# Altium PCB 106756.PcbDoc
Units mm, origin at the board's own origin, x right, y up, seen from the top; angles counter-clockwise.
Board outline 178.31 x 84.33 mm, 2 copper layers (Top Layer, Bottom Layer); 43 components, 33 nets, 148 pads, 59 vias.
Unrouted connection lines stored in the file: 1.
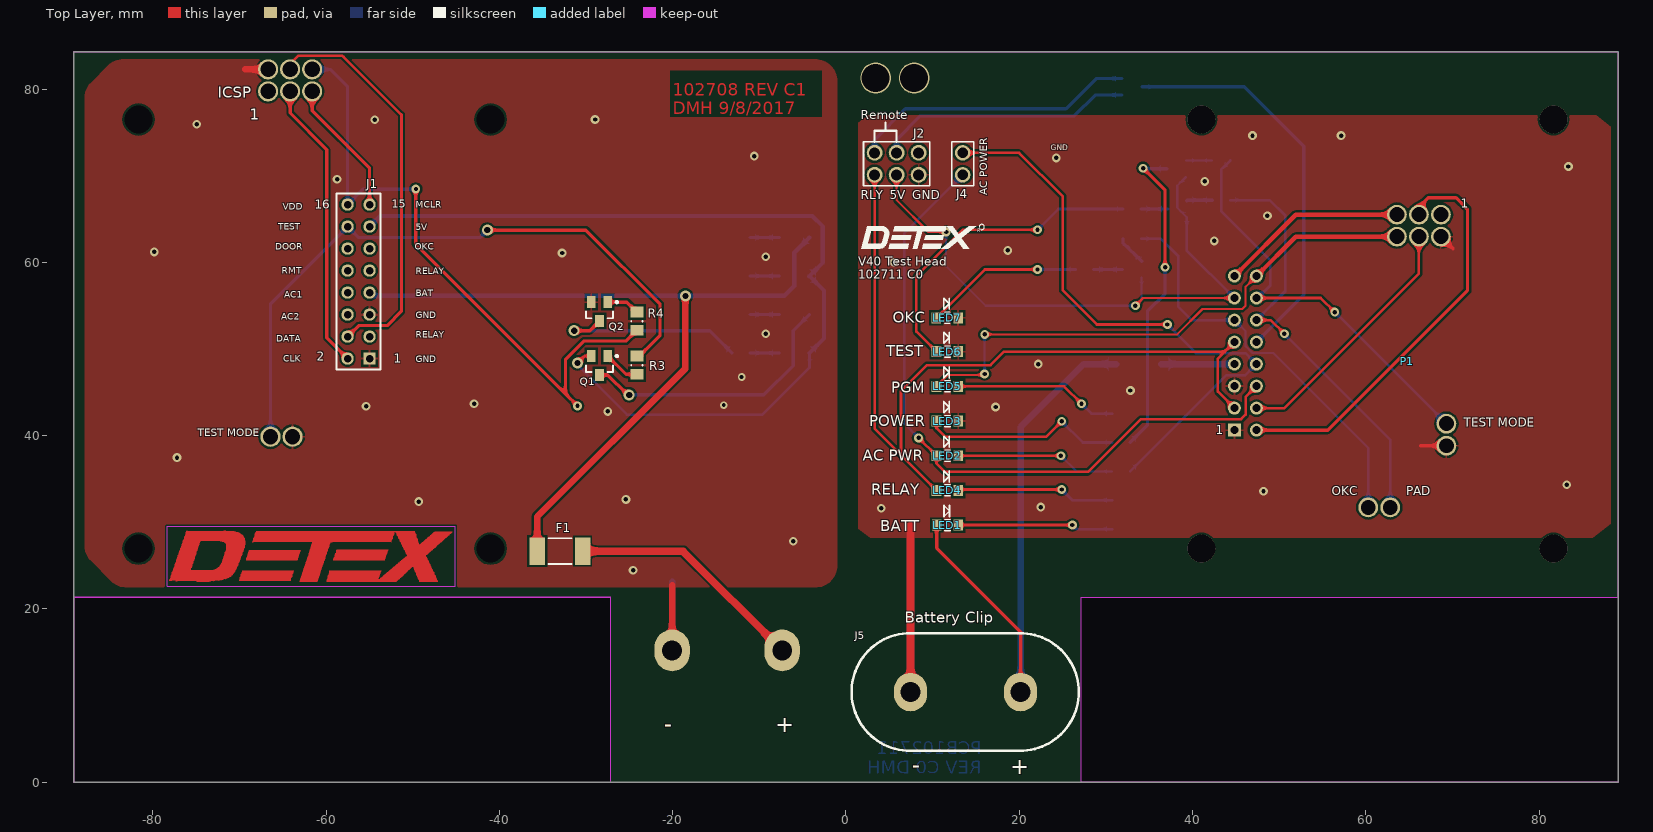
[diagram p0: Top Layer view]
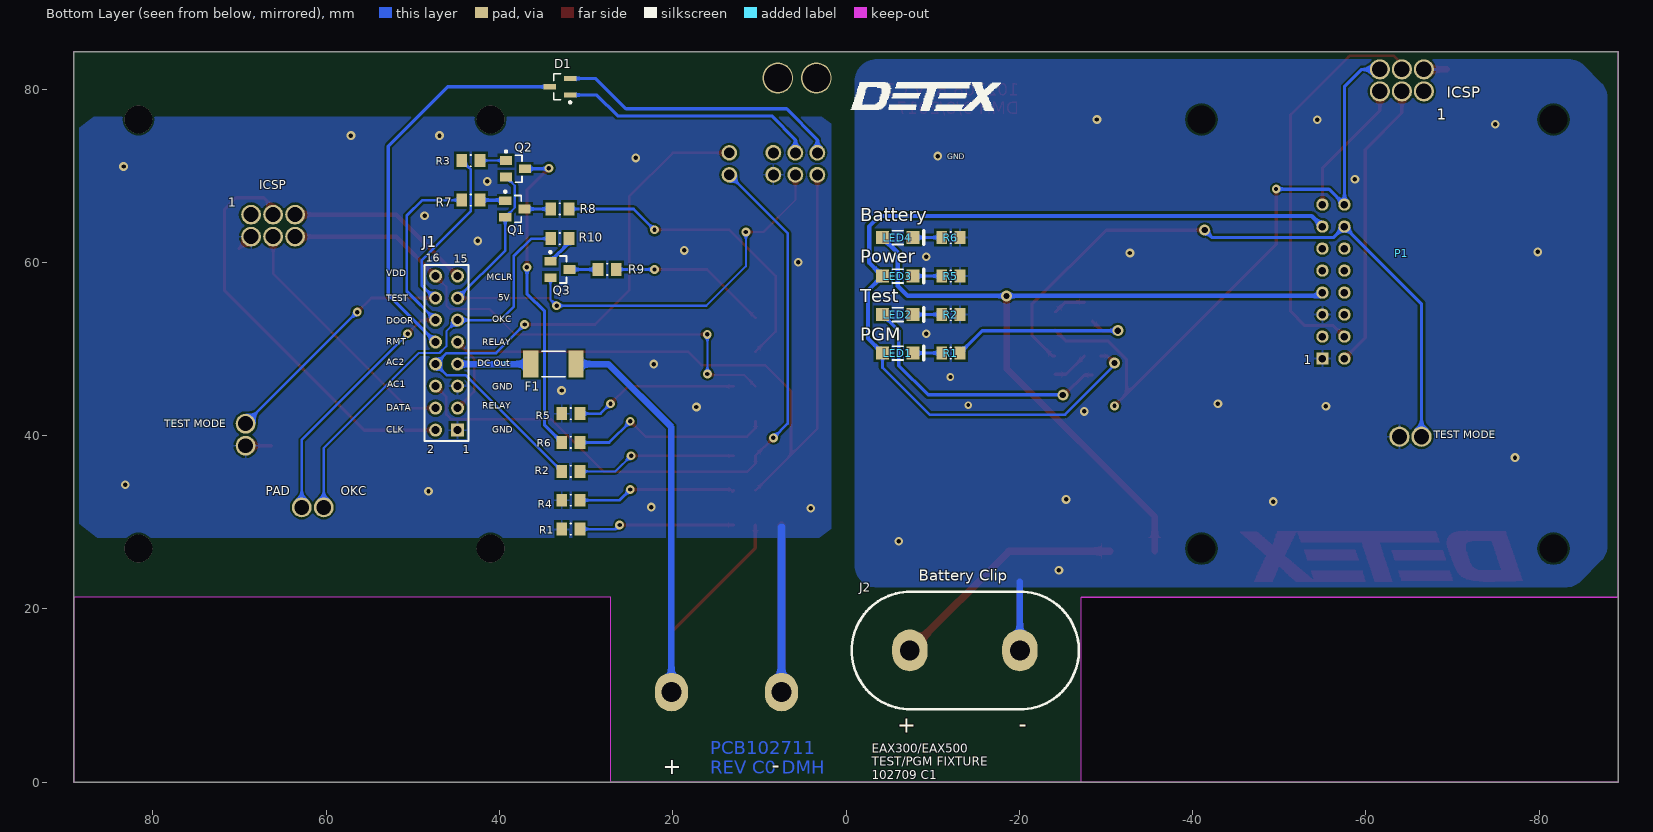
[diagram p1: Bottom Layer view, seen from below]

## Layer stack, top to bottom
Top Solder: solder mask 0.0102, Solder Resist, Dk 3.5
Top Layer: signal copper 0.0356
Dielectric 1: dielectric 0.32, FR-4, Dk 4.8
Bottom Layer: signal copper 0.0356
Bottom Solder: solder mask 0.0102, Solder Resist, Dk 3.5

## Board outline
-89.152,0 89.156,0 89.156,84.328 -89.152,84.328
cut-out: -89.152,21.336 -89.152,0 -27.176,0 -27.176,21.336
cut-out: 89.156,21.336 89.156,0 27.176,0 27.176,21.336

## Design rules (kind name [scope] priority, off if disabled: settings)
Clearance [All] p1: gap=0.254 ignorepadtopadclearanceinfootprint=FALSE except(0: Arc-Hole Track-Hole SMDPad-Hole THPad-Hole Via-Hole Fill-Hole Poly-Hole Region-Hole Text-Hole)
PlaneClearance [(InNet('GND') AND IsTrack OR IsPolygon)] p1: clearance=0
PlaneClearance PlaneClearance_1 [All] p2: clearance=0.508
PlaneConnect PlaneConnect_1 [InNet('GND')] p1: pad.planeconnectstyle=Relief pad.reliefexpansion=0.508 pad.reliefentries=4 pad.reliefconductorwidth=0.254 pad.reliefairgap=0.254 via.planeconnectstyle=Direct via.reliefexpansion=0.508 via.reliefentries=4 via.reliefconductorwidth=0.254 via.reliefairgap=0.254
PlaneConnect [All] p2: planeconnectstyle=Relief reliefexpansion=0.508 reliefentries=4 reliefconductorwidth=0.254 reliefairgap=0.254
PolygonConnect PolygonConnect_1 [InNet('GND') vs IsVia] p1: connectstyle=Direct reliefconductorwidth=0.254 reliefentries=4 polygonreliefangle="90 Angle" airgapwidth=0.254
PolygonConnect [All] p2: connectstyle=Relief reliefconductorwidth=0.254 reliefentries=4 polygonreliefangle="90 Angle" airgapwidth=0.254
RoutingVias [All] p1: holewidth=0.711 width=1.27 viastyle="Through Hole" minholewidth=0.711 minwidth=1.27 maxholewidth=0.711 maxwidth=1.27
SolderMaskExpansion [All] p1: expansion=0.102
Width [All] p1: maxlimit=3.81 minlimit=0.254 preferedwidth=0.254
28 further rules are at their usual default settings.

## Components (designator, comment, footprint, x,y, rotation, side; value= is the part's Value field where it differs from the comment)
D1 "BAS70-05" SOT-23_M 33.022,80.264 r0 bottom
F1 "1812L050PR" LFUS-1812L050_V -33.018,26.67 r0 top
F1 "1812L050PR" LFUS-1812L050_V 33.784,48.26 r0 bottom
J1 "2x8 Header" 2x9_header -54.989,66.675 r180 top locked
J1 "2x8 Header" HDR2X8 44.833,40.64 r90 bottom
J2 "Battery Connector" "Battery Connector" -7.364,15.215 r180 bottom locked
J2 "2X3 CONN" HDR2X3 3.304,70.104 r0 top
J4 "AC POWER" HDR1X2 13.464,70.104 r90 top
J5 "DC POWER" BAT_CONN 20.156,10.4 r0 top
LED1 "HSMG-C150" AVAG-HSMX-C150_V -5.967,49.53 r180 bottom
LED1 "BATT PWR" LTST-C170YKT_V 11.716,29.682 r0 top
LED2 "HSMG-C150" AVAG-HSMX-C150_V -5.967,53.975 r180 bottom
LED2 "AC PWR" LTST-C170YKT_V 11.698,37.682 r0 top
LED3 "HSMG-C150" AVAG-HSMX-C150_V -5.967,58.42 r180 bottom
LED3 "LTST-C170YKT" LTST-C170YKT_V 11.698,41.682 r0 top
LED4 "HSMG-C150" AVAG-HSMX-C150_V -5.967,62.865 r180 bottom
LED4 "LTST-C190GKT" LTST-C170YKT_V 11.698,33.682 r0 top
LED5 "LTST-C170CKT" LTST-C170YKT_V 11.698,45.682 r0 top
LED6 "LTST-C170CKT" LTST-C170YKT_V 11.698,49.695 r0 top
LED7 "LTST-C170CKT" LTST-C170YKT_V 11.686,53.594 r0 top
P1 "POGO PINS" "EAX500 POGOS" -66.698,79.731 r180 bottom locked
P1 "V40 POGOS" V40_POGOS 68.663,65.506 r0 top locked
Q1 "MMBT3906" FAIR-SOT23-3_V -28.448,48.09 r270 top
Q1 "MMBT3906" FAIR-SOT23-3_V 38.229,66.167 r180 bottom
Q2 "MMBT3904" FAIR-SOT23-3_V -28.448,54.313 r270 top
Q2 "MMBT3906" FAIR-SOT23-3_V 38.145,70.805 r180 bottom
Q3 "MMBT3906" FAIR-SOT23-3_V 33.022,59.182 r180 bottom
R1 "Res1" RESC0805(2012)_M -12.097,49.53 r180 bottom value=1K
R1 "Res1" RESC0805(2012)_M 31.752,29.21 r0 bottom value=1K
R2 "Res1" RESC0805(2012)_M -12.097,53.975 r180 bottom value=1K
R2 "Res1" RESC0805(2012)_M 31.752,35.877 r0 bottom value=3.3K
R3 "Res1" RESC0805(2012)_M -24.13,48.133 r90 top value=1K
R3 "Res1" RESC0805(2012)_M 43.309,71.755 r180 bottom value=1K
R4 "Res1" RESC0805(2012)_M -24.13,53.213 r90 top value=1K
R4 "Res1" RESC0805(2012)_M 31.752,32.544 r0 bottom value=1K
R5 "Res1" RESC0805(2012)_M -12.097,58.42 r180 bottom value=1K
R5 "Res1" RESC0805(2012)_M 31.752,42.545 r0 bottom value=1K
R6 "Res1" RESC0805(2012)_M -12.097,62.865 r180 bottom value=2.2K
R6 "Res1" RESC0805(2012)_M 31.752,39.211 r180 bottom value=1K
R7 "Res1" RESC0805(2012)_M 43.309,67.183 r180 bottom value=1K
R8 "Res1" RESC0805(2012)_M 33.022,66.167 r180 bottom value=1K
R9 "Res1" RESC0805(2012)_M 27.561,59.182 r180 bottom value=1K
R10 "Res1" RESC0805(2012)_M 33.022,62.738 r180 bottom value=1K

## Footprints (in the part's own frame and the unit in brackets; to place one, negate y for a bottom-side part, rotate by r counter-clockwise, add the part's x,y. Pads: shape width x height; smd on the part's side, far side on the other; paste and mask are expansions set on the pad)
2x9_header [mil]
  rect 56x56 hole 34: 1(0,700)
  round 56 hole 34: 2(100,700) 3(0,600) 4(100,600) 5(0,500) 6(100,500) 7(0,400) 8(100,400) 9(0,300) 10(100,300) 11(0,200) 12(100,200) 13(0,100) 14(100,100) 15(0,0) 16(100,0)
  silkscreen extent -50,-50 150,750
AVAG-HSMX-C150_V [mm] "SMD, 2-Leads, Body 3.2x1.6mm"
  rect 1.5x1.5 smd: 1(-1.75,0) 2(1.75,0)
  silkscreen extent -0.6,-0.8 3,0.8, body extent -1.6,-0.8 1.6,0.8, height 1.1
BAT_CONN [mil]
  oval 150x175 hole 90: 1(0,0) 2(-500,0)
  silkscreen extent -768,-267 264,268
"Battery Connector" [mil]
  oval 160x190 hole 90: 1(0,0) 2(500,0)
  silkscreen extent -264,-268 768,267
"EAX500 POGOS" [mil]
  round 92 hole 70: 1(0,0) 2(0,100) 3(-100,0) 4(-100,100) 5(-200,0) 6(-200,100) 7(-11,-1569) 8(-111,-1569)
FAIR-SOT23-3_V [mm] "SOT23, 3-Leads, Body 3.12x1.5mm, Pitch 0.95mm"
  rect 1.4x1 smd: 1(-1.1,0.95) 2(-1.1,-0.95) 3(1.1,0)
  silkscreen extent -1.22,-1.55 0.75,2.13, body extent -1.35,-1.56 1.35,1.56, height 1.2
HDR1X2 [mil] "Connector; Header; 2 Position"
  round 70 hole 48: 1(0,0) 2(100,0)
  silkscreen extent -50,-50 150,50
HDR2X3 [mil] "Connector; Header; 3x2 Position"
  round 72 hole 50: 1(0,0) 2(0,100) 3(100,0) 4(100,100) 5(200,0) 6(200,100)
  silkscreen extent -50,-50 250,150
HDR2X8 [mm] "Connector; Header; 8x2 Position"
  rect 1.5x1.5 hole 0.9: 1(0,0)
  round 1.5 hole 0.9: 2(0,2.54) 3(2.54,0) 4(2.54,2.54) 5(5.08,0) 6(5.08,2.54) 7(7.62,0) 8(7.62,2.54) 9(10.16,0) 10(10.16,2.54) 11(12.7,0) 12(12.7,2.54) 13(15.24,0) 14(15.24,2.54) 15(17.78,0) 16(17.78,2.54)
  silkscreen extent -1.27,-1.27 19.05,3.81
LFUS-1812L050_V [mm] "Chip Fuse, 2-Leads, Body 4.73x3.41mm"
  rect 1.78x3.15 smd: 1(-2.615,0) 2(2.615,0)
  silkscreen extent -1.35,-1.47 1.35,1.48, body extent -2.36,-1.7 2.36,1.7, height 0.75
LTST-C170YKT_V [mm] "SMD, 2-Leads, Body 2x1.25mm"
  rect 1.1x1.25 smd: 1(-1.25,0) 2(1.25,0)
  silkscreen extent -0.41,-0.63 0.3,2.25, body extent -1,-0.63 1,0.63, height 1.1
RESC0805(2012)_M [mm] "Chip Resistor, Body 2.0x1.3mm, IPC Low Density"
  rect 1.25x1.5 smd: 1(-1.05,0) 2(1.05,0)
  silkscreen extent -0.05,-0.65 0.05,0.65, body extent -1.1,-0.67 1.1,0.67, height 0.7
SOT-23_M [mm] "SOT23, 3-Leads, Body 2.9x1.3mm, Pitch 0.95mm, Lead Span 2.5mm, IPC Low Density"
  rect 1.45x0.6 smd: 1(-1.175,0.95) 2(-1.175,-0.95) 3(1.175,0)
  silkscreen extent -1.3,-1.5 0.7,1.92, body extent -0.7,-1.5 0.7,1.5, height 1.1
V40_POGOS [mil]
  round 90 hole 68: 1(0,0) 2(0,-100) 3(-100,0) 4(-100,-100) 5(-200,0) 6(-200,-100) 7(25,-950) 8(25,-1050) 9(-230,-1330) 10(-330,-1330)

## Part data
D1: library part "D Schottky", "Dual Schottky Diode", MFR="DIODES, INC", ComponentLink1Description=Datasheet, ComponentLink1URL=http://www.mouser.com/ds/2/115/ds11007-768590.pdf, IFmax=70mA, MFR P/N=BAS70-05, PackageReference=SOT23
F1 F1: library part CMP-1700-00002-1, "POLY-FUSE(R) Resettable PTC, 0.5 A, 0.15 to 1 Ohm Resistance, -40 to 85 degC, 1812 (4532 Metric), RoHS, Tape and Reel", Case\Package=0603, Case Code (Metric)=1608, Max Operating Temperature="155 degC", Min Operating Temperature="-55 degC", Package Quantity=1, Power Rating="100 mW", Resistance="150 kohm", Tolerance=1%, Voltage Rating="50 V", Case Code (Imperial)=0603, ComponentLink1Description="Manufacturer URL", ComponentLink1URL=http://www.littelfuse.com/, ComponentLink2Description=Datasheet, ComponentLink2URL=http://www.littelfuse.com/~/media/electronics/datasheets/resettable_ptcs/littelfuse_ptc_1812l_datasheet.pdf.pdf, DatasheetVersion=Feb-16, Height="0.45 mm", Length="1.6 mm", Mount="Surface Mount", PackageDescription="2-Pin Surface Mount Device, Body 4.55 x 3.24 mm", PackageReference=1812, Packaging="Tape and Reel", Pins=2, REACH SVHC="No SVHC", RoHSCompliant=true, Voltage Rating (DC)="50 V", Width="0.8 mm"
J1 J1: library part "2x9 Header"
  J1: DESC="RIBBON CONN"
J2: library part "Header 3X2", "Header, 3-Pin, Dual row", LatestRevisionDate=17-Jul-2002, LatestRevisionNote="Re-released for DXP Platform.", Publisher="Altium Limited"
J4 J5: library part "Header 2", "Header, 2-Pin", LatestRevisionDate=17-Jul-2002, LatestRevisionNote="Re-released for DXP Platform.", Publisher="Altium Limited"
LED1 LED2 LED3 LED4: library part CMP-2000-05061-1, "Chip LED, Green, 65 mW, 25 mA, -40 to 85 degC, 2-Pin SMD, RoHS, Tape and Reel", Forward Current If=20mA, Forward Voltage=2.2V, Forward Voltage VF Max=2.6V, LED Colour=Green, Manufacturer=Avago, Operating Temperature Max=85degC, Operating Temperature Min=-30degC, Operating Temperature Range=-30degCto+85degC, Opto Case Style=SMD, Package Description="2-Pin Surface Mount Device, Body 3.2 x 1.6 mm", Package Reference=HSMX-C150, Reverse Protection Voltage=5V, Storage Temperature Min=-40degC, Bulb Size=1.6mmx2mm, Datasheet URL=https://datasheet.ciiva.com/11774/0900766b804a6539-11774272.pdf, Datasheet Version=Mar-12, Dominant Wavelength=572nm, External Depth=1.1mm, External Length / Height=3.2mm, External Width=1.6mm, Forward Current If Max=20mA, LED Mounting=SMD, LED Type=Standard, Lens Shape=Rectangular, Light Output Orientation=TopEmitting, Luminous Intensity=15mcd, Luminous Intensity @ If Min=4.5mcd, Luminous Intensity Typ=15mcd, Manufacturer URL=http://www.avagotech.com/, Material=GaP, Mounting Type=SMD, MSL=MSL2A-4weeks, No. of Pins=2, Opto Mounting Orientation=Top, Packaging=CutTape, Peak Wavelength=570nm, PIV Max=5V, Storage Temperature Max=85degC, SVHC=NoSVHC(16-Jun-2014), Viewing Angle=170deg, Voltage Vf Min=2.2V, Voltage Vf Typ=2.2V, Wavelength Typ=572nm
LED1 LED2: library part LED-ORANGE-AK-2
LED3: library part CMP-1674-00003-5, "LED Uni-Color Yellow, 60 mW, 80 mA, -55 to 85 degC, 2-Pin SMD, RoHS, Tape and Reel", Colour=Yellow, Manufacturer=Lite-On, Max Operating Temperature="85 degC", Min Operating Temperature="-55 degC", Package Quantity=3000, ComponentLink1Description="Manufacturer URL", ComponentLink1URL=http://www.us.liteon.com/, ComponentLink2Description=Datasheet, ComponentLink2URL="http://media.digikey.com/pdf/Data Sheets/Lite-On PDFs/LTST-C170YKT.pdf", DatasheetVersion=03/2000, DESC=TEST, Height="1.1 mm", Length="2 mm", Mount="Surface Mount", Mounting Technology="Surface Mount", PackageDescription="2-Pin Surface Mount Device, Body 2 x 1.25 mm", PackageReference=C170YKT, Packaging="Tape and Reel", Pins=2, RoHSCompliant=true
LED4: library part CMP-1674-00007-1, "LED Uni-Color Green, 100 mW, 5 V, -55 to 85 degC, 2-Pin SMD, RoHS, Tape and Reel", ComponentLink1Description="Manufacturer URL", ComponentLink1URL=http://www.us.liteon.com/, ComponentLink2Description=Datasheet, ComponentLink2URL=http://datasheet.octopart.com/LTST-C190GKT-Lite-On-datasheet-158530.pdf, DatasheetVersion=Dec-06, PackageDescription="2-Pin Surface Mount Device, Body 1.6 x 0.8 mm", PackageReference=C190GKT
LED5 LED6 LED7: library part CMP-1674-00001-5, "LED Uni-Color Red, 100 mW, 200 mA, -55 to 85 degC, 2-Pin SMD, RoHS, Tape and Reel", Colour=Red, Manufacturer=Lite-On, Max Operating Temperature="85 degC", Min Operating Temperature="-55 degC", Package Quantity=3000, ComponentLink1Description="Manufacturer URL", ComponentLink1URL=http://www.us.liteon.com/, ComponentLink2Description=Datasheet, ComponentLink2URL=http://media.digikey.com/pdf/Data%20Sheets/Lite-On%20PDFs/LTST-C170CKT.pdf, DatasheetVersion=03/2003, Height="1.1 mm", Length="2 mm", Mount="Surface Mount", Mounting Technology="Surface Mount", PackageDescription="2-Pin Surface Mount Device, Body 2 x 1.25 mm", PackageReference=C170CKT, Packaging="Tape and Reel", Pins=2, RoHSCompliant=true
  LED5: DESC=PGM
  LED6: DESC=DOOR
  LED7: DESC=OKC
P1: library part "EAX500 POGO"
P1: library part V40_POGOS
Q1 Q1 Q2 Q3: library part CMP-1670-00011-1, "PNP General-Purpose Amplifier, 40 V, 0.2 A, -55 to 150 degC, 3-Pin SOT23, RoHS, Tape and Reel", Capacitance="1 uF", Case\Package=Radial, Max Operating Temperature="105 degC", Min Operating Temperature="-55 degC", Package Quantity=200, Tolerance=20%, Voltage Rating="50 V", ComponentLink1Description="Manufacturer URL", ComponentLink1URL=https://www.fairchildsemi.com/, ComponentLink2Description=Datasheet, ComponentLink2URL=https://www.fairchildsemi.com/datasheets/MM/MMBT3906.pdf, ComponentLink3Description="Package Specification", ComponentLink3URL=http://www.fairchildsemi.com/dwg/MA/MA03D.pdf, DatasheetVersion="Rev. 1.2.2, 04/2014", Diameter="5 mm", Height="11 mm", Lead Pitch="2 mm", Length="12 mm", Mount="Through Hole", PackageDescription="3-Pin Small Outline Transistor, Body 2.92 x 1.325 mm, Pitch 0.95 mm", PackageReference=SOT23-3, Packaging=Bulk, Pins=2, Radiation Hardening=No, REACH SVHC="No SVHC", RoHSCompliant=true, Voltage Rating (DC)="50 V", Width="0 inch"
Q2: library part CMP-1670-00008-1, "NPN General Purpose Amplifier, 40 V, 0.2 A, -55 to 150 degC, 3-Pin SOT23, RoHS, Tape and Reel", Capacitance="1.8E-11 f", Frequency="12.288 MHz", Frequency Tolerance=30ppm, Load Capacitance="18 pF", Max Operating Temperature=70degC, Min Operating Temperature=-20degC, Package Quantity=1000, ComponentLink1Description="Manufacturer URL", ComponentLink1URL=https://www.fairchildsemi.com/, ComponentLink2Description=Datasheet, ComponentLink2URL=https://www.fairchildsemi.com/datasheets/MM/MMBT3904.pdf, ComponentLink3Description="Package Specification", ComponentLink3URL=http://www.fairchildsemi.com/dwg/MA/MA03D.pdf, DatasheetVersion="Rev. 1.1.0, 10/2014", ESR="40 Ohm", Height="0.041 inch", Length="0.197 inch", Mount="Surface Mount", PackageDescription="3-Pin Small Outline Transistor, Body 2.92 x 1.325 mm, Pitch 0.95 mm", PackageReference=SOT23-3, Packaging="Tape and Reel", Pins=4, REACH SVHC="No SVHC", RoHSCompliant=True, Tolerance=30ppm, Width="0.126 inch"
R1 R1 R2 R2 R3 R3 R4 R4 R5 R5 R6 R6 R7 R8 R9 R10: "Resistor", LatestRevisionDate=17-Jul-2002, LatestRevisionNote="Re-released for DXP Platform.", PackageDescription="Axial Device, Thru-Hole; 2 Leads; 0.3 in Pin Spacing", PackageReference=AXIAL-0.3, Published=8-Jun-2000, Publisher="Altium Limited"

## Free pads (board coordinates)
  round 0 hole 3.2 unplated: 0(-81.659,26.962) 0(-81.659,76.492) 0(-41.019,26.962) 0(-41.019,76.492)
  round 3.556 hole 3.226: 0(3.431,81.28) 0(7.876,81.28)
  round 3.2 hole 3.2 unplated: 0(41.023,26.966) 0(41.023,76.496) 0(81.663,26.966) 0(81.663,76.496)

## Via types
v1: diameter 1.016, hole 0.508, Top Layer to Bottom Layer, tented both sides, 48 vias
v2: diameter 1.27, hole 0.711, Top Layer to Bottom Layer, tented both sides, 5 vias
v3: diameter 0.889, hole 0.457, Top Layer to Bottom Layer, tented both sides, 2 vias
v4: diameter 1.016, hole 0.508, Top Layer to Bottom Layer, tented bottom, 2 vias
v5: diameter 1.016, hole 0.457, Top Layer to Bottom Layer, tented both sides, 1 vias
v6: diameter 1.016, hole 0.508, Top Layer to Bottom Layer, tented top, 1 vias

## Nets (pads, with @x,y where several pads share a name; then routed paths per layer and width w, separated by ;. In a path a pad name is that pad's centre, name@x,y a point inside that pad or via, vN(x,y) a via of type N, cw(c..) or ccw(c..) an arc to the next point about the centre after c; other vN are vias at no path point)
5V: J1.13 J2.3 LED1.1@-4.217,49.53 LED3.1@-4.217,58.42 Q1.2 Q2.2@39.245,69.855 Q3.2 | length 175.5
  Top Layer w0.254: J2.3 5.844,67.183 9.527,63.5 v1(11.559,63.5) ; v1(33.403,54.991) 34.292,55.88 J1.13@44.833,55.88
  Top Layer w0.305: v2(-30.988,48.387) -30.185,49.19 Q1.2@-29.398,49.19
  Bottom Layer w0.254: v1(11.559,63.5) 11.559,59.563 16.131,54.991 v1(33.403,54.991) 34.122,55.71 Q3.2 ; Q2.2@39.245,69.855 38.229,68.839 38.229,66.317 Q1.2@39.329,65.217
  Bottom Layer w0.305: v2(-30.988,48.387) -30.988,48.135 -25.271,42.418 -9.652,42.418 -4.217,47.853 LED1.1@-4.217,49.53 ; Q1.2@39.329,65.217 39.329,61.384 J1.13@44.833,55.88
  Bottom Layer w0.457: LED1.1@-4.217,49.53 -2.538,51.209 -2.538,56.741 LED3.1@-4.217,58.42
  Bottom Layer w0.508: J1.13@-54.989,64.135 -53.77,65.354 -3.884,65.354 -2.665,64.135 -2.665,59.972 LED3.1@-4.217,58.42
AC1: J1.6 J4.1 LED2.1@10.448,37.682 | length 80.3
  Top Layer w0.305: v1(8.384,39.746) 10.448,37.682 10.448,36.798 11.432,35.814 27.942,35.814 34.038,41.91 45.595,41.91 46.128,42.443 46.128,44.475 J1.6@47.373,45.72
  Bottom Layer w0.305: v1(8.384,39.746) 6.733,41.397 6.733,63.373 J4.1
AC2: J1.8 J4.2 R2.2@32.802,35.877 | length 70.1
  Top Layer w0.305: J4.2 19.981,72.644 25.021,67.604 25.021,56.769 28.958,52.832 v1(37.096,52.832)
  Bottom Layer w0.305: R2.2@32.802,35.877 43.914,46.99 46.103,46.99 47.373,48.26 46.103,49.53 40.398,49.53 v1(37.096,52.832)
BATT: F1.1 J1.7@-54.989,56.515 J5.1 LED1.1@10.466,29.682 LED4.1@-4.217,62.865 | length 160.4
  Top Layer w0.381: LED1.1@10.466,29.682 10.466,27.026 20.156,17.336 J5.1
  Top Layer w0.762: F1.1@-35.633,26.67 -35.633,30.659 -18.54,47.752 v2(-18.54,56.134)
  Bottom Layer w0.508: J1.7@-54.989,56.515 -54.608,56.134 v2(-18.54,56.134) -7.11,56.134 -5.967,57.277 -5.967,61.115 LED4.1@-4.217,62.865
  Bottom Layer w0.762: J5.1 20.156,40.982 27.434,48.26 F1.1@31.169,48.26
CLK: J1.2 P1.3 | length 81.5
  Top Layer w0.381: P1.3@-64.158,79.731 -64.158,77.241 -59.942,73.025 -59.942,51.308 J1.2@-57.529,48.895 ; J1.2@47.373,40.64 55.628,40.64 71.732,56.744 71.732,66.142 70.411,67.462 67.21,67.462 66.123,66.375 P1.3@66.123,65.506
DATA: J1.4 P1.4 | length 76.3
  Top Layer w0.279: P1.4@-64.158,82.271 -64.158,82.906 -63.206,83.858 -58.139,83.858 -57.986,83.706
  Top Layer w0.305: -57.986,83.706 -51.306,77.025 ; J1.4@47.373,43.18 50.599,43.18 66.123,58.704 P1.4@66.123,62.966
  Top Layer w0.381: J1.4@-57.529,51.435 -56.259,52.705 -52.957,52.705 -51.306,54.356 -51.306,77.025
DOOR: J1.12 P1.9 R7.1 | length 49.5
  Top Layer w0.305: J1.12@47.373,53.34 49.024,53.34 v1(50.599,51.765)
  Bottom Layer w0.305: R7.1 48.906,67.183 50.7,65.389 50.7,56.667 J1.12@47.373,53.34 ; v1(50.599,51.765) 50.599,51.714 62.821,39.492 P1.9
GND: J1.1 J1.5 J2.2@-20.064,15.215 J2.5 J5.2 LED3.2@12.948,41.682 LED6.2 LED7.2 P1.2 P1.8 Q2.2@-29.398,55.413 R1.2@32.802,29.21 R2.2@-13.147,53.975 R4.2@32.802,32.544 R5.2 R6.2@-13.147,62.865 | length 61.3
  Top Layer w0.381: 66.312,38.836 P1.8@69.298,38.836 ; P1.2@68.663,62.966 70.072,61.557
  Top Layer w0.762: -69.34,82.271 P1.2@-66.698,82.271 ; J2.2@-20.064,15.215 -20.064,22.733
  Top Layer w0.889: J5.2 7.456,29.63
  Bottom Layer w0.762: J2.2@-20.064,15.215 -20.064,23.114
  Bottom Layer w0.889: 7.419,29.413 7.456,29.376 J5.2
  other v1: -24.57,24.46 -6.094,27.813 22.479,31.75 -49.303,32.385 -25.398,32.639 48.193,33.587 83.187,34.325 -77.214,37.465 -27.498,42.799 17.274,43.307 -55.383,43.386 -42.924,43.688 32.822,45.212 22.184,48.26 -9.269,51.765 5.524,60.021 -9.269,60.655 -32.764,61.087 -79.832,61.214 18.671,61.384 42.514,62.484 48.643,65.389 41.404,69.342 -58.74,69.596 83.384,71.065 46.919,74.633 57.152,74.633 -74.928,75.946 -54.401,76.454 -28.954,76.49
  other v3: -14.11,43.516 -12.047,46.763
  other v4: 4.064,31.623 24.259,72.055
  other v6: -10.59,72.263
MCLR: J1.15 P1.5 | length 37.5
  Top Layer w0.381: P1.5@-61.618,79.731 -61.618,77.483 -54.989,70.853 J1.15@-54.989,66.675
  Top Layer w0.508: J1.15@44.833,58.42 51.919,65.506 P1.5@63.583,65.506
NetD1_1: D1.1 J2.4 | length 29.7
  Bottom Layer w0.381: J2.4 5.844,74.168 8.577,76.901 26.357,76.901 28.77,79.314 D1.1
NetD1_2: D1.2 J2.2@3.304,72.644 | length 33
  Bottom Layer w0.381: J2.2@3.304,72.644 3.304,74.168 6.86,77.724 25.402,77.724 28.892,81.214 D1.2
NetF1_2: F1.2 J1.7@44.833,48.26 J2.1@-7.364,15.215 | length 36.2
  Top Layer w0.889: F1.2@-30.403,26.67 -18.819,26.67 J2.1@-7.364,15.215
  Bottom Layer w0.762: F1.2@36.399,48.26 J1.7@44.833,48.26
NetLED1_2: LED1.2 R1.1 | length 21.3
  Top Layer w0.305: LED1.2@12.966,29.682 v1(26.128,29.682)
  Bottom Layer w0.305: v1(26.128,29.682) 26.6,29.21 R1.1@30.702,29.21
  Bottom Layer w0.381: R1.1@-11.047,49.53 LED1.2@-7.717,49.53
NetLED2_1: LED2.1@-4.217,53.975 Q1.3@-28.448,46.99 | length 31.4
  Top Layer w0.381: Q1.3@-28.448,46.99 -27.475,46.99 -25.318,44.833 -25.146,44.833 v2(-25.017,44.704)
  Bottom Layer w0.381: v2(-25.017,44.704) -9.468,44.704 -6.094,48.078 -6.094,52.098 LED2.1@-4.217,53.975
NetLED2_2: LED2.2 R2.1 | length 21.8
  Top Layer w0.254: LED2.2@12.948,37.682 v1(24.804,37.682)
  Bottom Layer w0.254: v1(24.804,37.682) 26.608,35.877 R2.1@30.702,35.877
  Bottom Layer w0.381: R2.1@-11.047,53.975 LED2.2@-7.717,53.975
NetLED3_1: LED3.1@10.448,41.682 R6.2@30.702,39.211 | length 23.2
  Top Layer w0.305: LED3.1@10.448,41.682 10.448,40.862 11.432,39.878 23.116,39.878 v1(24.894,41.656)
  Bottom Layer w0.305: v1(24.894,41.656) 27.339,39.211 R6.2@30.702,39.211
NetLED3_2: LED3.2@-7.717,58.42 R5.1@-11.047,58.42 | length 3.3
  Bottom Layer w0.381: R5.1@-11.047,58.42 LED3.2@-7.717,58.42
NetLED4_2: LED4.2 R4.1@30.702,32.544 R6.1@-11.047,62.865 | length 21.8
  Top Layer w0.305: LED4.2@12.948,33.682 13.102,33.528 13.356,33.782 v1(24.894,33.782)
  Bottom Layer w0.305: v1(24.894,33.782) 26.132,32.544 R4.1@30.702,32.544
  Bottom Layer w0.381: R6.1@-11.047,62.865 LED4.2@-7.717,62.865
NetLED5_2: LED5.2 R5.1@30.702,42.545 | length 19.1
  Top Layer w0.305: LED5.2 25.186,45.682 v1(27.18,43.688)
  Bottom Layer w0.305: v1(27.18,43.688) 28.323,42.545 R5.1@30.702,42.545
NetLED6_1: LED6.1 R8.2 | length 36.7
  Top Layer w0.305: LED6.1 8.13,52.013 8.13,58.42 13.464,63.754 v1(22.1,63.754)
  Bottom Layer w0.305: v1(22.1,63.754) 24.513,66.167 R8.2
NetLED7_1: LED7.1 R9.2 | length 18.4
  Top Layer w0.305: LED7.1 16.024,59.182 v1(22.1,59.182)
  Bottom Layer w0.305: v1(22.1,59.182) R9.2
NetQ1_1: Q1.1 R3.1@-24.13,47.083 R7.2 | length 7.2
  Top Layer w0.381: Q1.1@-27.498,49.19 -25.391,47.083 R3.1@-24.13,47.083
  Bottom Layer w0.381: Q1.1@39.329,67.117 39.395,67.183 R7.2
NetQ1_3: Q1.3@37.129,66.167 R8.1 | length 3.1
  Bottom Layer w0.381: R8.1 Q1.3@37.129,66.167
NetQ2_1: Q2.1 R3.2@42.259,71.755 R4.2@-24.13,54.263 | length 6.9
  Top Layer w0.381: Q2.1@-27.498,55.413 -25.28,55.413 R4.2@-24.13,54.263
  Bottom Layer w0.254: Q2.1@39.245,71.755 R3.2@42.259,71.755
NetQ2_3: Q2.3 R1.2@-13.147,49.53 R6.1@32.802,39.211 | length 59.8
  Top Layer w0.381: v2(-31.369,52.113) -29.548,52.113 Q2.3@-28.448,53.213 ; v1(34.292,70.866) 36.832,68.326 v1(36.832,59.436)
  Bottom Layer w0.381: v2(-31.369,52.113) -15.73,52.113 R1.2@-13.147,49.53 ; R6.1@32.802,39.211 34.8,41.209 34.8,54.356 36.832,56.388 v1(36.832,59.436) ; v1(34.292,70.866) 34.353,70.805 Q2.3@37.045,70.805
NetQ3_1: Q3.1 R10.2 | length 3.5
  Bottom Layer w0.305: R10.2@31.972,62.282 R10.2
  Bottom Layer w0.381: R10.2@31.972,62.282 Q3.1
NetQ3_3: Q3.3 R9.1 | length 3.3
  Bottom Layer w0.381: R9.1 Q3.3
OKC: J1.11 P1.10 R10.1 | length 47.5
  Bottom Layer w0.254: J1.11@44.833,53.34 46.128,52.045 46.128,50.321 46.919,49.53 49.329,49.53 60.281,38.578 P1.10
  Bottom Layer w0.305: R10.1 36.324,62.738 38.356,60.706 38.356,54.864 39.88,53.34 J1.11@44.833,53.34
RELAY: J1.3@-54.989,51.435 J1.9@-54.989,59.055
RELAY_COM: J1.3@44.833,43.18 J1.9@44.833,50.8 J2.1@3.304,70.104 LED4.1@10.448,33.682 | length 96.8
  Top Layer w0.305: J2.1@3.304,70.104 3.304,40.826 6.352,37.778 ; LED4.1@10.448,33.682 6.352,37.778 ; J1.3@44.833,43.18 42.928,45.085 42.928,48.895 44.833,50.8 43.728,49.695 18.253,49.695 16.691,48.133 9.347,48.133 6.352,45.138 6.352,37.778
RMT: D1.3 J1.10 | length 46.3
  Bottom Layer w0.381: D1.3 45.976,80.264 52.834,73.406 52.834,56.261 J1.10@47.373,50.8
TEST: J1.14 P1.7 R3.1@44.359,71.755 R3.2@-24.13,49.183 | length 123
  Top Layer w0.305: J1.14@47.373,55.88 54.794,55.88 v1(56.42,54.254)
  Top Layer w0.381: v2(-41.402,63.722) -30.029,63.722 -21.463,55.156 -21.463,51.562 -23.842,49.183 R3.2@-24.13,49.183
  Bottom Layer w0.305: R3.1@44.359,71.755 43.309,70.705 43.309,65.913 48.979,60.243 48.979,57.359 47.5,55.88 J1.14@47.373,55.88 ; v1(56.42,54.254) P1.7@69.298,41.376
  Bottom Layer w0.381: P1.7@-66.419,39.878 -66.419,55.245 -57.529,64.135 -56.259,62.865 -42.259,62.865 v2(-41.402,63.722)
VDD: J1.16 LED5.1 P1.6 R4.1@-24.13,52.163 | length 137.7
  Top Layer w0.254: LED5.1 11.756,46.99 15.877,46.99 v1(16.004,47.117) ; v1(16.024,51.689) 38.219,51.689 41.14,54.61 45.722,54.61 46.128,55.016 46.128,57.175 J1.16@47.373,58.42
  Top Layer w0.381: v5(-49.655,68.453) -49.655,62.103 -32.385,44.833 ; v1(-30.986,43.434) -32.385,44.833 ; R4.1@-24.13,52.163 -25.366,50.927 -30.226,50.927 -32.385,48.768 -32.385,44.833
  Top Layer w0.508: J1.16@47.373,58.42 51.919,62.966 P1.6@63.583,62.966
  Bottom Layer w0.254: v1(16.004,47.117) 16.004,51.669 v1(16.024,51.689)
  Bottom Layer w0.381: P1.6@-61.618,82.271 -59.536,82.271 -57.529,80.264 -57.529,66.675 -55.751,68.453 v5(-49.655,68.453)
pads on no net: J2.6 P1.1

## Polygon pours and split planes (outlines as drawn)
GND on Top Layer "GND_L01_P004" (solid, remove dead copper, pour order 4): -83.02,22.479 cw(c-83.02,25.019) -84.816,23.223 -87.138,25.545 cw(c-85.342,27.341) -87.882,27.341 -87.882,78.958 cw(c-85.342,78.958) -87.138,80.754 -85.197,82.695 cw(c-83.401,80.899) -83.401,83.439 -3.554,83.439 cw(c-3.554,80.899) -1.014,80.899 -1.014,25.019 cw(c-3.554,25.019) -3.554,22.479
GND on Top Layer "GND_L01_P012" (solid, remove dead copper, pour order 12): 1.399,76.097 2.502,76.962 86.612,76.962 88.267,75.664 88.267,29.816 86.199,28.194 2.778,28.194 1.399,29.275
GND on Bottom Layer "GND_L02_P006" (solid, remove dead copper, pour order 6): -83.02,22.479 cw(c-83.02,25.019) -84.816,23.223 -87.138,25.545 cw(c-85.342,27.341) -87.882,27.341 -87.882,78.958 cw(c-85.342,78.958) -87.138,80.754 -85.197,82.695 cw(c-83.401,80.899) -83.401,83.439 -3.554,83.439 cw(c-3.554,80.899) -1.014,80.899 -1.014,25.019 cw(c-3.554,25.019) -3.554,22.479
GND on Bottom Layer "Top Layer-No Net" (solid, remove dead copper, pour order 14): 1.704,75.972 2.806,76.835 86.842,76.835 88.496,75.541 88.496,29.812 86.429,28.194 3.081,28.194 1.704,29.273

## Keep-outs
Top Layer:
  lines w0.025: -78.348,22.596 -78.348,29.53 -45.112,29.53 -45.112,22.596 -78.348,22.596
Keep-Out Layer:
  lines w0.127: 0.256,84.328 -89.152,84.328 -89.152,21.336 -29.335,21.336 -27.176,21.336 -27.176,0 0.256,0 27.176,0 27.176,21.34 89.156,21.34 89.156,84.33 0.256,84.33

## Other copper
Top Layer:
  region: 540 vertices and 1 holes, not listed, extent -78.092,23.147 -69.364,29.036
  region: 2087 vertices and 0 holes, not listed, extent -68.517,23.147 -45.427,28.993
  region: 319 vertices and 0 holes, not listed, extent -70.042,23.231 -63.729,24.418
  region: 322 vertices and 0 holes, not listed, extent -69.279,25.604 -62.924,26.79
  region: 323 vertices and 0 holes, not listed, extent -59.196,25.646 -52.841,26.833
  text "102708 REV C1 / DMH 9/8/2017" at -20.001,77.089 h1.44
Bottom Layer:
  text "PCB102711 / REV C0 DMH" at 15.663,0.966 h1.52

## Silkscreen, mask and mechanical layers (free items; w line width, h text height)
Top Overlay:
  circle w0.102: c15.677,64.084 r0.305
  region: 3.004,64.154 2.318,61.595 1.765,61.595 2.451,64.154
  region: 2.877,64.154 4.191,64.154 4.267,64.148 4.331,64.141 4.413,64.122 4.483,64.097 4.566,64.059 4.635,64.014 4.718,63.957 4.782,63.887 4.832,63.83 4.889,63.741 4.934,63.64 4.966,63.532 4.985,63.424 4.978,63.303 4.972,63.214 4.68,62.141 4.655,62.071 4.616,62.001 4.566,61.912 4.502,61.836 4.426,61.773 4.362,61.722 4.305,61.684 4.235,61.658 4.14,61.62 4.032,61.601 3.975,61.595 2.28,61.595 2.464,62.128 3.962,62.128 4.026,62.141 4.051,62.154 4.089,62.179 4.121,62.211 4.147,62.243 4.172,62.293 4.191,62.357 4.451,63.411 4.445,63.443 4.432,63.468 4.413,63.5 4.375,63.538 4.35,63.57 4.28,63.608 4.242,63.621 4.191,63.627 2.864,63.621
  region: 5.074,62.128 7.264,62.128 7.118,61.595 4.928,61.595
  region: 5.347,63.138 7.537,63.138 7.391,62.605 5.201,62.605
  region: 9.195,63.138 11.297,63.138 11.157,62.605 9.049,62.605
  region: 8.922,62.128 11.03,62.122 10.884,61.589 8.776,61.589
  region: 12.325,64.154 13.018,63.221 14.186,64.154 15.037,64.154 13.329,62.795 14.23,61.595 13.564,61.595 12.916,62.465 11.824,61.595 10.973,61.595 12.598,62.89 11.659,64.154
  region: 11.57,64.154 11.43,63.621 8.776,63.621 8.23,61.595 7.703,61.595 8.242,63.621 5.474,63.621 5.613,64.154
  lines w0.254: 3.304,73.914 3.304,75.184 5.844,75.184 5.844,73.914 ; 4.574,75.184 4.574,76.133
  text "ICSP" at -72.515,78.994 h1.27
  text "Remote" at 1.729,76.505 h1.02
  text "1" at -68.832,76.454 h1.27
  text "GND" at 23.622,72.937 h0.65
  text "AC POWER" at 16.312,67.727 h0.89 r90
  text "RLY" at 1.704,67.31 h1.02
  text "5V" at 5.029,67.31 h1.02
  text "GND" at 7.622,67.31 h1.02
  text "15" at -52.449,66.294 h0.94
  text "MCLR" at -49.655,66.294 h0.76
  text "16" at -61.339,66.167 h1.02
  text "VDD" at -65.011,66.083 h0.76
  text "TEST" at -65.53,63.754 h0.76
  text "5V" at -49.655,63.722 h0.76
  text "R" at 15.169,63.322 h0.64
  text "DOOR" at -65.849,61.468 h0.76
  text "OKC" at -49.782,61.468 h0.76
  text "RMT" at -65.131,58.674 h0.76
  text "RELAY" at -49.655,58.642 h0.76
  text "V40 Test Head / 102711 C0" at 1.402,58.085 h1.02
  text "BAT" at -49.655,56.102 h0.76
  text "AC1" at -64.844,55.892 h0.76
  text "GND" at -49.655,53.562 h0.76
  text "AC2" at -65.171,53.352 h0.76
  text "OKC" at 5.387,53.035 h1.27
  text "RELAY" at -49.655,51.276 h0.76
  text "DATA" at -65.762,50.812 h0.76
  text "TEST" at 4.676,49.174 h1.27
  text "2" at -61.085,48.641 h1.02
  text "CLK" at -64.931,48.526 h0.76
  text "GND" at -49.655,48.482 h0.76
  text "1" at -52.195,48.387 h1.02
  text "PGM" at 5.209,44.958 h1.27
  text "POWER" at 2.669,41.057 h1.27
  text "1" at 42.699,40.183 h1.02
  text "TEST MODE" at -74.801,39.916 h0.89
  text "AC PWR" at 1.907,37.084 h1.27
  text "RELAY" at 2.923,33.182 h1.27
  text "BATT" at 3.939,28.957 h1.27
  text "-" at -20.064,5.74 h1.91
  text "+" at -5.992,5.74 h1.91
Bottom Overlay:
  drawing of 6 lines, arcs and shapes, not listed
  text "ICSP" at -69.34,78.994 h1.27
  text "1" at -68.197,76.454 h1.27
  text "GND" at -11.684,71.882 h0.65
  text "Battery" at -1.651,64.772 h1.52
  text "Power" at -1.651,59.944 h1.52
  text "VDD" at 53.063,58.42 h0.76
  text "MCLR" at 41.448,57.963 h0.76
  text "5V" at 40.124,55.575 h0.76
  text "TEST" at 53.063,55.524 h0.76
  text "Test" at -1.651,55.372 h1.52
  text "OKC" at 40.846,53.086 h0.76
  text "DOOR" at 53.063,52.934 h0.76
  text "PGM" at -1.651,50.927 h1.52
  text "RMT" at 53.063,50.495 h0.76
  text "RELAY" at 41.999,50.444 h0.76
  text "AC2" at 53.063,48.108 h0.76
  text "DC Out" at 42.547,48.006 h0.76
  text "AC1" at 52.936,45.568 h0.76
  text "GND" at 40.809,45.314 h0.76
  text "RELAY" at 41.999,43.078 h0.76
  text "DATA" at 53.063,42.875 h0.76
  text "GND" at 40.809,40.335 h0.76
  text "CLK" at 53.063,40.335 h0.76
  text "TEST MODE" at -67.859,39.716 h0.89
  text "EAX300/EAX500 / TEST/PGM FIXTURE / 102709 C1" at -2.995,0.356 h1.02
Mechanical 1:
  lines w0.127: -89.152,21.336 -89.152,84.33 89.156,84.33 89.156,21.34 27.176,21.34 27.176,0 -27.176,0 -27.176,21.336 -89.152,21.336
Drill Drawing:
  circle w0.254: c-120.84,122.532 r1.402
  circle w0.254: c-120.84,84.687 r0.841
  circle w0.254: c-120.84,84.687 r1.402
  lines w0.127: 0.256,84.328 -89.152,84.328 -89.152,21.336 -29.335,21.336 -27.176,21.336 -27.176,0 27.176,0 27.176,21.34 89.156,21.34 89.156,84.33 0.256,84.33
  lines w0.254: -6.221,-9.144 -0.887,-2.667 ; -2.03,-2.921 -0.887,-2.667 ; -0.887,-3.81 -0.887,-2.667 ; -122.242,90.293 -121.541,90.994 -122.242,91.695 -121.541,91.695 -120.84,92.396 -120.139,91.695 -119.439,91.695 -120.139,90.994 -119.439,90.293 -120.139,90.293 -120.84,89.593 -121.541,90.293 -122.242,90.293 ; -122.242,95.9 -119.439,95.9 -119.439,98.703 -122.242,98.703 -122.242,95.9 ; -122.242,105.011 -120.84,102.207 -119.439,105.011 -122.242,105.011 ; -122.242,108.515 -122.242,109.216 -121.541,109.917 -122.242,110.617 -122.242,111.318 -121.541,111.318 -120.84,110.617 -120.139,111.318 -119.439,111.318 -119.439,110.617 -120.139,109.917 -119.439,109.216 -119.439,108.515 -120.139,108.515 -120.84,109.216 -121.541,108.515 -122.242,108.515 ; -122.242,116.224 -120.84,114.822 -119.439,116.224 -120.84,117.626 -122.242,116.224 ; -122.242,128.138 -121.541,128.839 -122.242,129.54 -121.541,129.54 -120.84,130.241 -120.139,129.54 -119.439,129.54 -120.139,128.839 -119.439,128.138 -120.139,128.138 -120.84,127.437 -121.541,128.138 -122.242,128.138 ; -122.242,133.745 -120.84,134.446 -119.439,133.745 -120.139,135.147 -119.439,136.548 -120.84,135.847 -122.242,136.548 -121.541,135.147 -122.242,133.745 ; -122.242,142.856 -120.84,140.052 -119.439,142.856 -122.242,142.856 ; -122.242,147.061 -122.242,148.462 -121.541,148.462 -121.541,149.163 -120.139,149.163 -120.139,148.462 -119.439,148.462 -119.439,147.061 -120.139,147.061 -120.139,146.36 -121.541,146.36 -121.541,147.061 -122.242,147.061 ; -122.242,152.667 -119.439,152.667 -119.439,155.471 -122.242,155.471 -122.242,152.667 ; -121.681,96.461 -119.999,96.461 -119.999,98.143 -121.681,98.143 -121.681,96.461 ; -121.681,128.419 -121.261,128.839 -121.681,129.26 -121.261,129.26 -120.84,129.68 -120.42,129.26 -119.999,129.26 -120.42,128.839 -119.999,128.419 -120.42,128.419 -120.84,127.998 -121.261,128.419 -121.681,128.419 ; -121.681,142.295 -120.84,140.613 -119.999,142.295 -121.681,142.295
  lines w0.381: -322.243,81.393 -116.976,81.393 ; -322.243,157.083 -116.976,157.083 ; -289.523,75.085 -289.523,163.39 ; -265.252,75.085 -265.252,163.39 ; -234.929,75.085 -234.929,163.39 ; -214.19,75.085 -214.19,163.39 ; -163.657,75.085 -163.657,163.39 ; -139.608,75.085 -139.608,163.39 ; -322.243,75.085 -116.976,75.085 -116.976,163.39 -322.243,163.39 -322.243,75.085
  lines w0.508: 0,-3.175 0,94.361
  text "Pad Shape" at -291.415,158.975 h3.03
  text "Via/Pad" at -267.145,158.975 h3.03
  text "Hole Type" at -236.821,158.975 h3.03
  text "Plated" at -216.082,158.975 h3.03
  text "Hole Size" at -165.55,158.975 h3.03
  text "Count" at -141.5,158.975 h3.03
  text "Symbol" at -120.761,158.975 h3.03
  text "Rounded" at -291.415,152.667 h2.52
  text "Pad" at -267.145,152.667 h2.52
  text "Round" at -236.821,152.667 h2.52
  text "PTH" at -216.082,152.667 h2.52
  text "48.00mil (1.2190mm)" at -165.55,152.667 h2.52
  text "2" at -141.5,152.667 h2.52
  text "Rounded" at -291.415,146.36 h2.52
  text "Pad" at -267.145,146.36 h2.52
  text "Round" at -236.821,146.36 h2.52
  text "PTH" at -216.082,146.36 h2.52
  text "127.00mil (3.2260mm)" at -165.55,146.36 h2.52
  text "2" at -141.5,146.36 h2.52
  text "Rounded" at -291.415,140.052 h2.52
  text "Via" at -267.145,140.052 h2.52
  text "Round" at -236.821,140.052 h2.52
  text "PTH" at -216.082,140.052 h2.52
  text "18.00mil (0.4570mm)" at -165.55,140.052 h2.52
  text "3" at -141.5,140.052 h2.52
  text "Rounded" at -291.415,133.745 h2.52
  text "Pad" at -267.145,133.745 h2.52
  text "Round" at -236.821,133.745 h2.52
  text "PTH" at -216.082,133.745 h2.52
  text "90.00mil (2.2860mm)" at -165.55,133.745 h2.52
  text "4" at -141.5,133.745 h2.52
  text "Rounded" at -291.415,127.437 h2.52
  text "Via" at -267.145,127.437 h2.52
  text "Round" at -236.821,127.437 h2.52
  text "PTH" at -216.082,127.437 h2.52
  text "28.00mil (0.7110mm)" at -165.55,127.437 h2.52
  text "5" at -141.5,127.437 h2.52
  text "Rounded" at -291.415,121.13 h2.52
  text "Pad" at -267.145,121.13 h2.52
  text "Round" at -236.821,121.13 h2.52
  text "PTH" at -216.082,121.13 h2.52
  text "50.00mil (1.2700mm)" at -165.55,121.13 h2.52
  text "6" at -141.5,121.13 h2.52
  text "Rounded" at -291.415,114.822 h2.52
  text "Pad" at -267.145,114.822 h2.52
  text "Round" at -236.821,114.822 h2.52
  text "PTH" at -216.082,114.822 h2.52
  text "70.00mil (1.7780mm)" at -165.55,114.822 h2.52
  text "8" at -141.5,114.822 h2.52
  text "Rounded" at -291.415,108.515 h2.52
  text "Pad" at -267.145,108.515 h2.52
  text "Round" at -236.821,108.515 h2.52
  text "NPTH" at -216.082,108.515 h2.52
  text "126.00mil (3.2000mm)" at -165.55,108.515 h2.52
  text "8" at -141.5,108.515 h2.52
  text "Rounded" at -291.415,102.207 h2.52
  text "Pad" at -267.145,102.207 h2.52
  text "Round" at -236.821,102.207 h2.52
  text "PTH" at -216.082,102.207 h2.52
  text "68.00mil (1.7270mm)" at -165.55,102.207 h2.52
  text "10" at -141.5,102.207 h2.52
  text "(Mixed)" at -291.415,95.9 h2.52
  text "Pad" at -267.145,95.9 h2.52
  text "Round" at -236.821,95.9 h2.52
  text "PTH" at -216.082,95.9 h2.52
  text "34.00mil (0.8640mm)" at -165.55,95.9 h2.52
  text "16" at -141.5,95.9 h2.52
  text "(Mixed)" at -291.415,89.593 h2.52
  text "Pad" at -267.145,89.593 h2.52
  text "Round" at -236.821,89.593 h2.52
  text "PTH" at -216.082,89.593 h2.52
  text "35.43mil (0.9000mm)" at -165.55,89.593 h2.52
  text "16" at -141.5,89.593 h2.52
  text "Rounded" at -291.415,83.285 h2.52
  text "Via" at -267.145,83.285 h2.52
  text "Round" at -236.821,83.285 h2.52
  text "PTH" at -216.082,83.285 h2.52
  text "20.00mil (0.5080mm)" at -165.55,83.285 h2.52
  text "51" at -141.5,83.285 h2.52
  text "131 Total" at -141.5,76.978 h2.52
  text "Daniel Hahaj - (830) 629-2900 x4370 / Detex Corp / P/N 106756 / GREEN MASK/WHITE SILK, BOTH SIDES / TWO-SIDED COPPER / FR4, 1.6mm THICKNESS / LEAD FREE - ROHS / 20MIL VERTICAL SCORE LINE AS SHOWN" at -120.82,15.28 h3.43
  text "20MIL SCORE LINE" at -7.14,-9.92 h1.02

## Dimensions
-0.233,92.583 to 0.275,92.583 on Drill Drawing
-89.152,21.336 to -89.152,84.328 on Drill Drawing
-89.152,84.328 to 89.156,84.33 on Drill Drawing
-27.176,0 to 27.176,0 on Drill Drawing
0.256,84.328 to 89.156,84.33 on Drill Drawing

## Text inside footprints (layer, text, board x,y; h text height)
J1: Bottom Overlay "1" at -52.83,48.26 h1.02
J1: Bottom Overlay "16" at 48.491,60.046 h0.94; Bottom Overlay "15" at 45.29,59.944 h0.94; Bottom Overlay "1" at 44.223,37.948 h0.94; Bottom Overlay "2" at 48.338,37.948 h0.94
J2: Bottom Overlay "Battery Clip" at -8.38,23.241 h1.27; Bottom Overlay "+" at -5.942,5.69 h1.91; Bottom Overlay "-" at -19.962,5.74 h1.91
J5: Bottom Overlay "+" at 21.147,2.551 h1.91 r180; Bottom Overlay "-" at 8.574,2.551 h1.91 r180; Top Overlay "Battery Clip" at 6.808,18.401 h1.27; Top Overlay "-" at 8.574,2.551 h1.91 r180; Top Overlay "+" at 21.147,2.551 h1.91 r180
P1: Bottom Overlay "PAD" at 66.961,33.134 h1.02; Bottom Overlay "OKC" at 58.325,33.134 h1.02; Bottom Overlay "ICSP" at 67.723,68.44 h1.02; Bottom Overlay "TEST MODE" at 78.696,40.995 h0.89; Bottom Overlay "1" at 71.279,66.408 h1; Top Overlay "OKC" at 56.039,33.134 h1.02; Top Overlay "PAD" at 64.675,33.134 h1.02; Top Overlay "1" at 70.949,66.306 h1; Top Overlay "TEST MODE" at 71.279,41.008 h1.02